# EAGLE board Buck V2 (EAGLE 9.4.2)
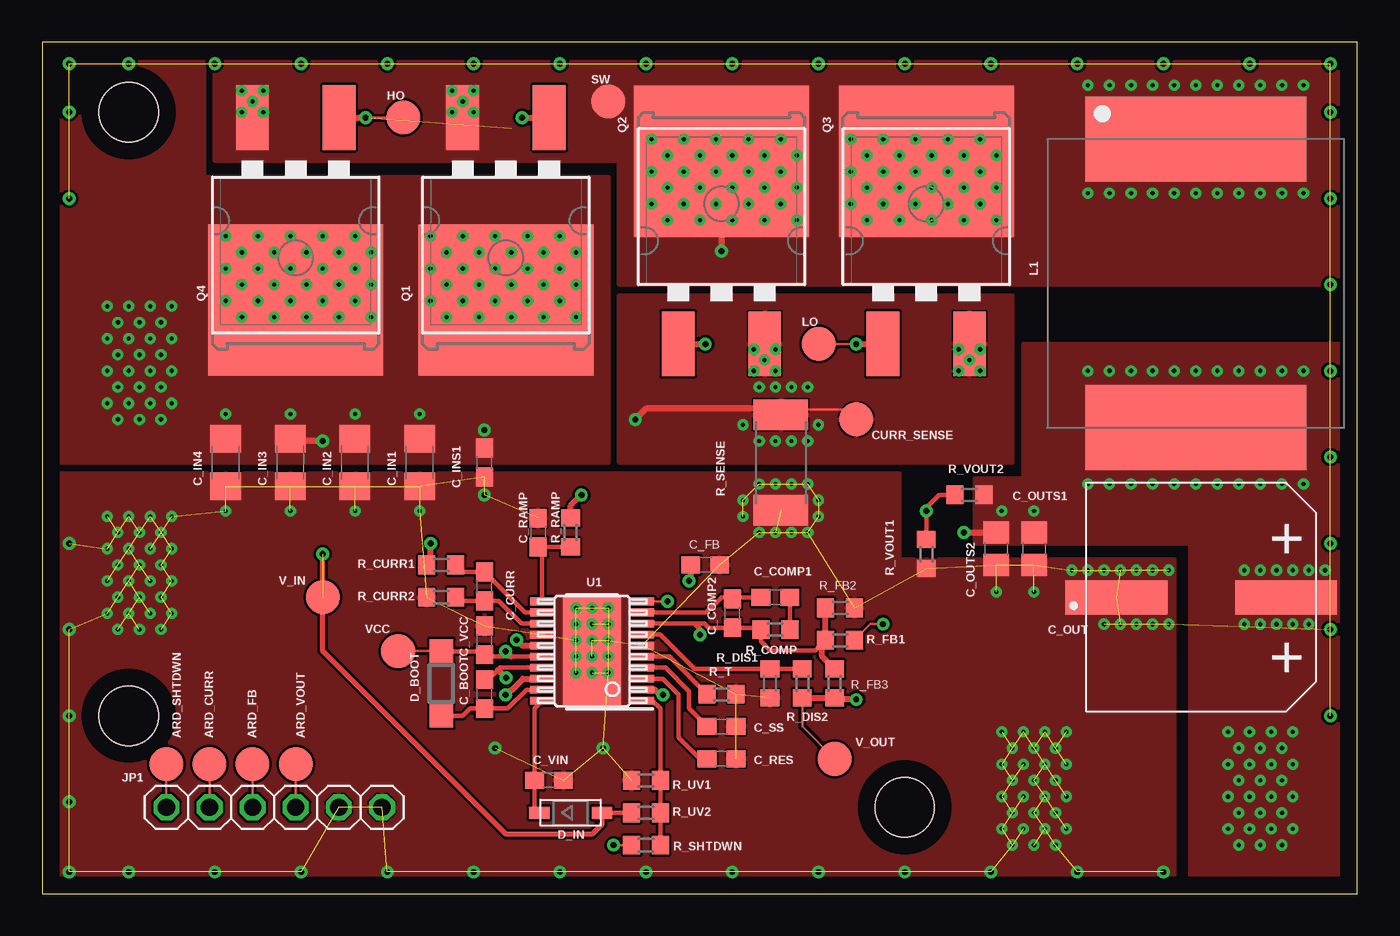
[diagram p0: board, top side]
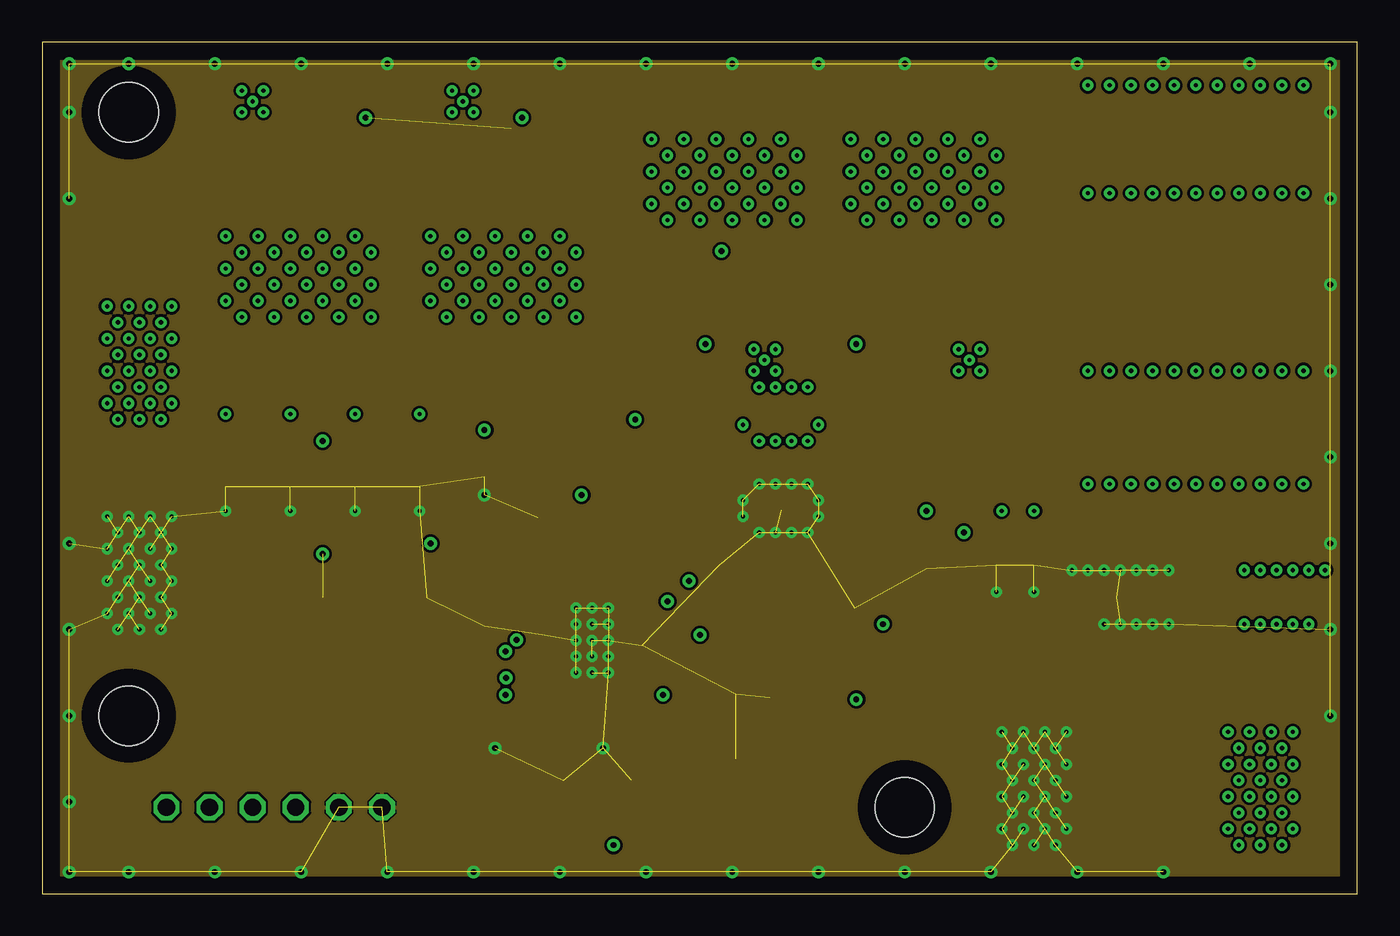
[diagram p1: board, inner layer Route2]
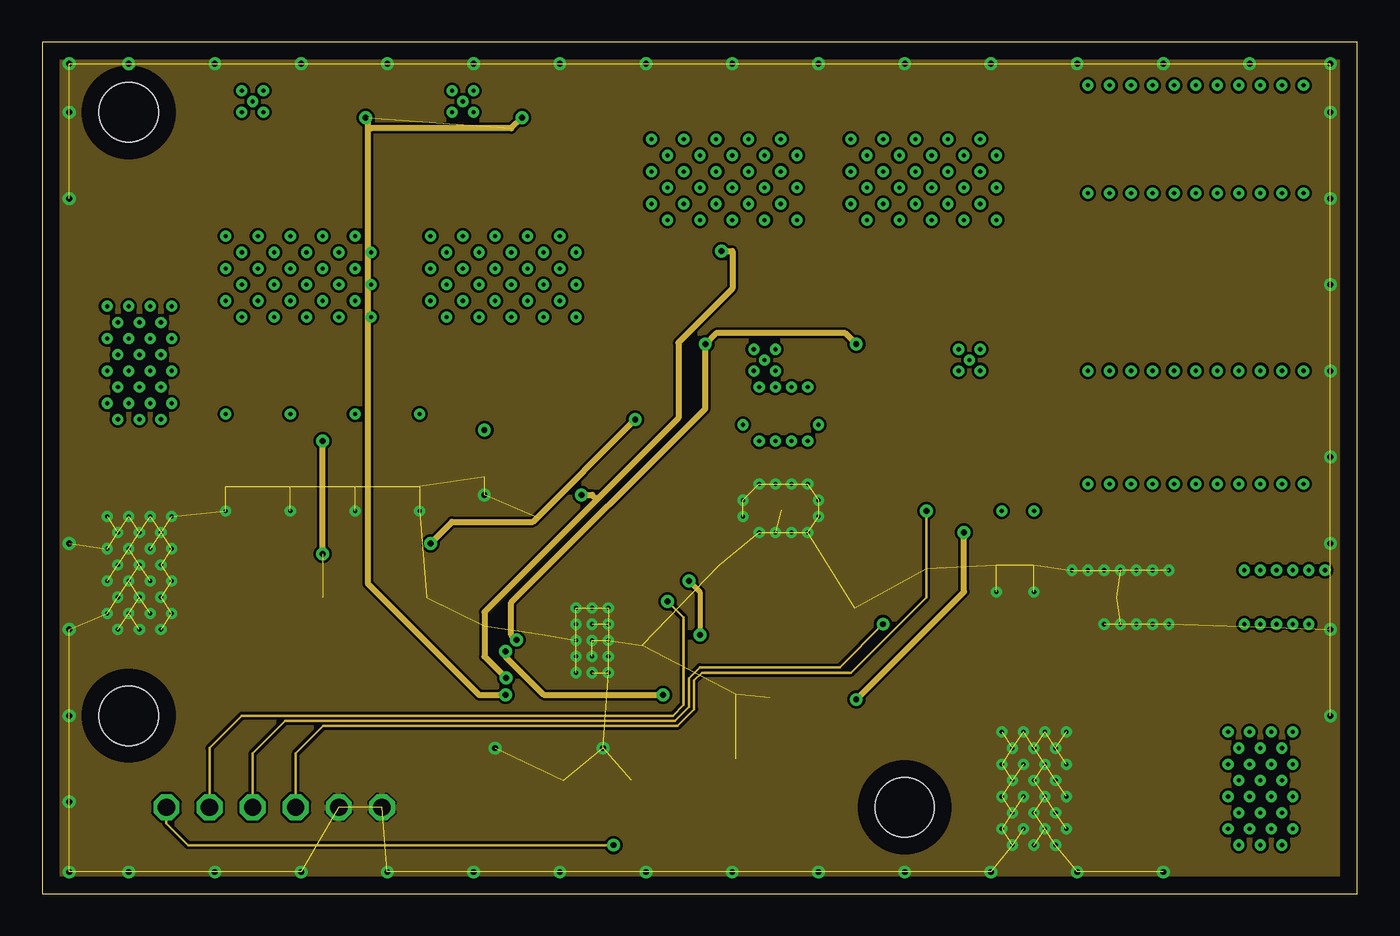
[diagram p2: board, inner layer Route15]
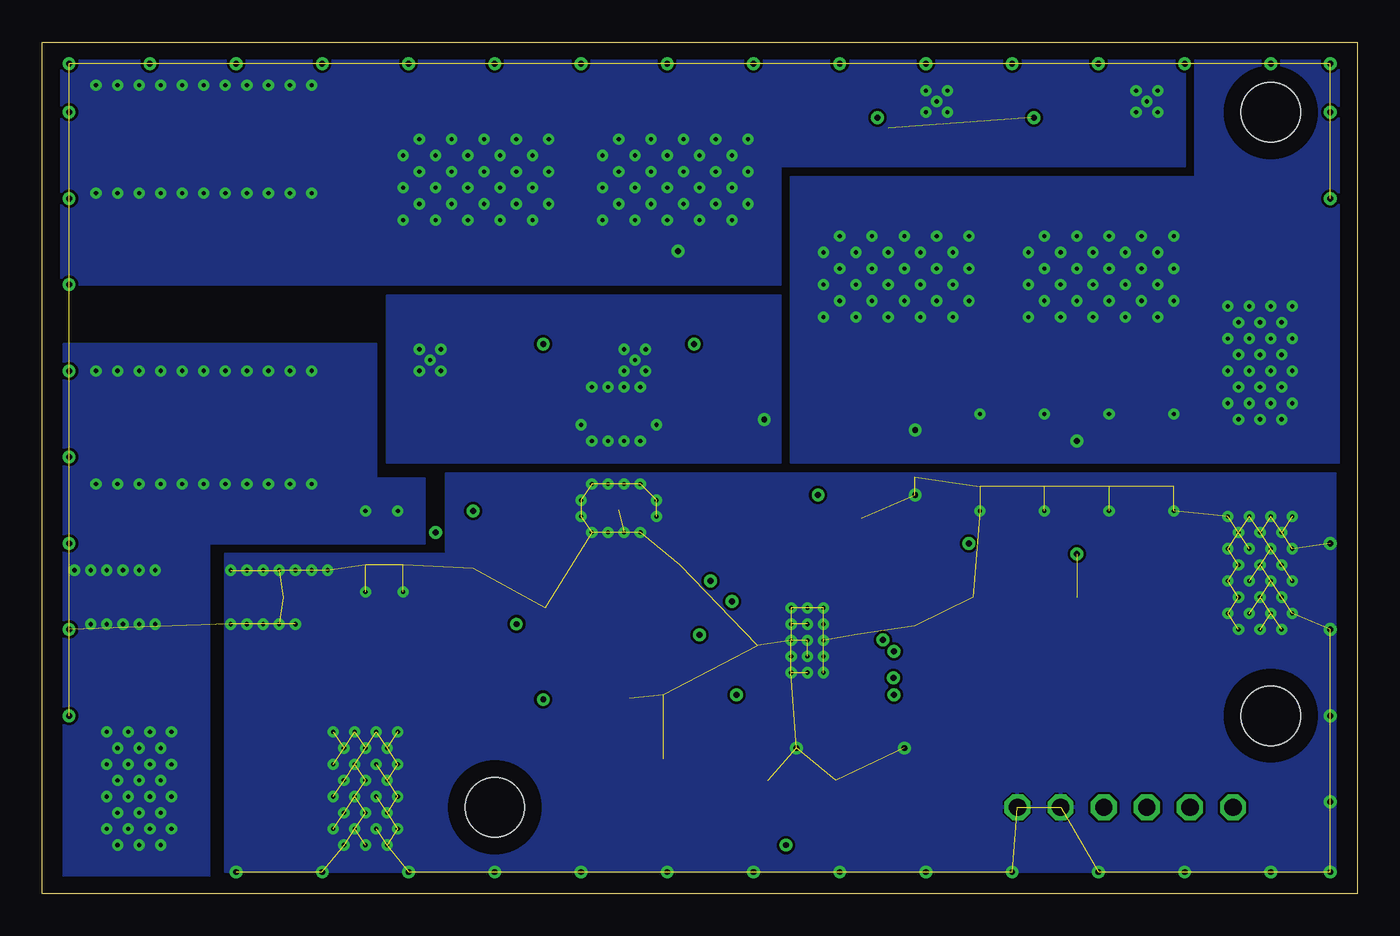
[diagram p3: board, bottom side, seen from below]

Size 77.45 x 50.15 mm. Coordinates in mm from the lower left corner, seen from the top.
Outline: 0,0 77.45,0 77.45,50.15 0,50.15 0,0
Copper layers (1+2*15+16): Top 0.035mm / dielectric 0.2mm / Route2 0.035mm / dielectric 1.3mm / Route15 0.035mm / dielectric 0.2mm / Bottom 0.035mm
Design rules "default *": minimum track width 4mil, minimum drill 0.2mm, track to track 6mil, track to pad 6mil, pad to pad 6mil, via to via 6mil, smd to smd 6mil, copper to edge 40mil, drill to drill 6mil, minimum pad ring 10mil, minimum via ring 8mil, stop-mask expansion 4mil, vias tented up to drill 0mil, thermal gap 4mil
Holes 3.48 mm at 50.8,5.08 5.08,46.04 5.08,10.48

## Footprints (pad centres in the part's own frame; a part is rotated, then mirrored left to right if it is on the bottom)
TP20R = smd 2 x 2: TP 0,0
C0603 = smd 1.1 x 1: 1 -0.85,0; 2 0.85,0
C1206 = smd 1.6 x 1.8: 1 -1.4,0; 2 1.4,0
CAP_PANASONIC_H13 = smd 6 x 2: P$1 -5,0; P$2 5,0
C0805 = smd 1.3 x 1.5: 1 -0.95,0; 2 0.95,0
SOD123 = smd 1.4 x 1.4: A 1.9,0; C -1.9,0
SOD-123 = smd 1.2 x 0.7: A 1.85,0; C -1.85,0
1X06 = drill 1.016 octagon: 1 -6.35,0; 2 -3.81,0; 3 -1.27,0; 4 1.27,0; 5 3.81,0; 6 6.35,0
17.5X17.5_INDUCTOR_SMD = smd 5 x 13: 1 0,0; 2 17,0
D2PAK = smd 1.93 x 3.81: 1 -2.55,-8.25; 3 2.55,-8.25 | smd 10.3 x 8.9: 2 0,2.5
R0603 = smd 1 x 1.1: 1 -0.85,0; 2 0.85,0
R2512 = smd 1.8 x 3.2: 1 -2.8,0; 2 2.8,0
PWP0020A = smd 1.4 x 0.45: 1 -2.95,2.925; 2 -2.95,2.275; 3 -2.95,1.625; 4 -2.95,0.975; 5 -2.95,0.325; 6 -2.95,-0.325; 7 -2.95,-0.975; 8 -2.95,-1.625; 9 -2.95,-2.275; 10 -2.95,-2.925; 11 2.95,-2.925; 12 2.95,-2.275; 13 2.95,-1.625; 14 2.95,-0.975; 15 2.95,-0.325; 16 2.95,0.325; 17 2.95,0.975; 18 2.95,1.625; 19 2.95,2.275; 20 2.95,2.925 | smd 3.4 x 6.5: 21 0,0

## Placement (x,y rotation side)
ARD_CURR  PTR1TP20R  [TP20R]  9.84,7.62 0 top
ARD_FB  PTR1TP20R  [TP20R]  12.38,7.62 0 top
ARD_SHTDWN  PTR1TP20R  [TP20R]  7.3,7.62 0 top
ARD_VOUT  PTR1TP20R  [TP20R]  14.92,7.62 0 top
C_BOOT  470 nF 50V  [C0603]  26.04,11.75 90 top
C_COMP1  1.2 nF  [C0603]  43.18,17.46 0 top
C_COMP2  82 pF  [C0603]  40.64,16.51 270 top
C_CURR  100 pF  [C0603]  26.04,18.1 270 top
C_FB  0.68 uF  [C0603]  39.05,19.37 0 top
C_IN1  10 uF  [C1206]  22.23,25.4 270 top
C_IN2  10 uF  [C1206]  18.41,25.4 270 top
C_IN3  10 uF  [C1206]  14.61,25.4 270 top
C_IN4  10 uF  [C1206]  10.79,25.4 270 top
C_INS1  100 nF  [C0603]  26.04,25.4 270 top
C_OUT  470 uF  [CAP_PANASONIC_H13]  68.26,17.46 0 top
C_OUTS1  1 uF  [C0805]  58.42,20.32 270 top
C_OUTS2  1 uF  [C0805]  56.2,20.32 270 top
C_RAMP  820pF 50V  [C0603]  29.21,21.27 90 top
C_RES  1 uF  [C0603]  40.01,7.94 0 top
C_SS  100 nF  [C0603]  40.01,9.84 0 top
C_VCC  1 UF  [C0603]  26.04,14.92 90 top
C_VIN  1 UF  [C0603]  29.84,6.67 0 top
CURR_SENSE  PTR1TP20R  [TP20R]  47.94,27.94 0 top
D_BOOT  PMEG10010ELRX  [SOD123]  23.5,12.38 90 top
D_IN  IN4148  [SOD-123]  31.11,4.76 0 top
HO  PTR1TP20R  [TP20R]  21.27,45.72 0 top
JP1  [1X06]  13.65,5.08 0 top
L1  [17.5X17.5_INDUCTOR_SMD]  67.94,44.45 270 top
LO  PTR1TP20R  [TP20R]  45.72,32.39 0 top
Q1  IRF3205STRLPBF  [D2PAK]  27.3,37.47 180 top
Q2  IRF3205STRLPBF  [D2PAK]  40.01,40.64 0 top
Q3  IRF3205STRLPBF  [D2PAK]  52.07,40.64 0 top
Q4  IRF3205STRLPBF  [D2PAK]  14.92,37.47 180 top
R_COMP  28.7 K  [R0603]  43.18,15.56 0 top
R_CURR1  100  [R0603]  23.5,19.37 180 top
R_CURR2  100  [R0603]  23.5,17.46 180 top
R_DIS1  3.3 K  [R0603]  42.86,12.38 270 top
R_DIS2  56 K  [R0603]  44.77,12.38 270 top
R_FB1  17 K  [R0603]  46.99,14.92 180 top
R_FB2  10 K  [R0603]  46.99,16.83 180 top
R_FB3  178 K  [R0603]  46.67,12.38 270 top
R_RAMP  180 KOhm  [R0603]  31.11,21.27 90 top
R_SENSE  1W 5mOhm  [R2512]  43.5,25.4 270 top
R_SHTDWN  1 K  [R0603]  35.56,2.86 0 top
R_T  12.1 K  [R0603]  40.01,11.75 180 top
R_UV1  3.3 K  [R0603]  35.56,6.67 180 top
R_UV2  56 K  [R0603]  35.56,4.76 180 top
R_VOUT1  1 K  [R0603]  52.07,20 90 top
R_VOUT2  5 K  [R0603]  54.61,23.49 0 top
SW  PTR1TP20R  [TP20R]  33.34,46.67 0 top
U1  Value  [PWP0020A]  32.38,14.29 180 top
V_IN  PTR1TP20R  [TP20R]  16.51,17.46 0 top
V_OUT  PTR1TP20R  [TP20R]  46.67,7.94 0 top
VCC  PTR1TP20R  [TP20R]  20.95,14.29 0 top

## Library data of the parts
ARD_CURR ARD_FB ARD_SHTDWN ARD_VOUT CURR_SENSE HO LO SW V_IN V_OUT VCC = testpad
C_BOOT C_IN4 C_OUTS1 C_OUTS2 C_RAMP C_VCC C_VIN = rcl; SPICEPREFIX: C
C_COMP1 C_COMP2 C_CURR C_FB C_IN1-C_IN3 C_INS1 C_RES C_SS R_COMP R_CURR1 R_CURR2 R_DIS1 R_DIS2 R_FB1-R_FB3 R_SHTDWN R_T R_UV1 R_UV2 R_VOUT1 R_VOUT2 = rcl
C_OUT L1 = custom-parts
D_BOOT = diode
D_IN JP1 = adafruit
Q1-Q4 = mixed_components
R_RAMP R_SENSE = rcl; SPICEPREFIX: R
U1 = AcceleratedDesigns_Lib; MANUFACTURER: Texas Instruments; PARTNUMBER: LM5117PMHXNOPB; REFDES: RefDes; TYPE: TYPE

## Nets
ARD_CURRENT: ARD_CURR.TP JP1.2 U1.10
ARD_FEEDBACK: ARD_FB.TP JP1.3 R_FB1.1
ARD_SHUTDOWN: ARD_SHTDWN.TP JP1.1 R_SHTDWN.1
ARD_VOUT: ARD_VOUT.TP JP1.4 R_VOUT1.2 R_VOUT2.1
GND: C_FB.2 C_IN1.2 C_IN2.2 C_IN3.2 C_IN4.2 C_INS1.2 C_OUT.P$1 C_OUTS1.2 C_OUTS2.2 C_RAMP.2 C_RES.2 C_SS.2 C_VCC.2 C_VIN.2 JP1.5 JP1.6 R_CURR2.2 R_DIS1.2 R_FB2.1 R_SENSE.2 R_T.1 R_UV1.2 R_VOUT1.1 U1.6 U1.14 U1.21
N$1: C_VCC.1 D_BOOT.A U1.2 U1.16 VCC.TP
N$2: C_BOOT.1 D_BOOT.C U1.19
N$3: C_BOOT.2 L1.1 Q1.3 Q2.2 Q3.2 Q4.3 R_RAMP.2 SW.TP U1.17
N$4: CURR_SENSE.TP Q2.3 Q3.3 R_CURR1.2 R_SENSE.1
N$5: C_RAMP.1 R_RAMP.1 U1.11
N$7: LO.TP Q2.1 Q3.1 U1.15
N$8: HO.TP Q1.1 Q4.1 U1.18
N$9: C_COMP1.2 R_COMP.2
N$10: C_VIN.1 D_IN.C U1.20
N$11: R_SHTDWN.2 R_UV1.1 R_UV2.1 U1.1
N$13: R_DIS1.1 R_DIS2.1 U1.7
N$14: C_COMP1.1 C_COMP2.1 U1.9
N$15: C_COMP2.2 C_FB.1 R_COMP.1 R_FB1.2 R_FB2.2 R_FB3.1 U1.8
N$16: R_T.2 U1.5
N$17: C_RES.1 U1.3
N$18: C_SS.1 U1.4
N$19: C_CURR.1 R_CURR1.1 U1.12
N$20: C_CURR.2 R_CURR2.1 U1.13
N$21: C_IN1.1 C_IN2.1 C_IN3.1 C_IN4.1 C_INS1.1 D_IN.A Q1.2 Q4.2 R_UV2.2 V_IN.TP
V_OUT: C_OUT.P$2 C_OUTS1.1 C_OUTS2.1 L1.2 R_DIS2.2 R_FB3.2 R_VOUT2.2 V_OUT.TP

## Tracks (layer width: path | path; a pad name or v marks a point on that pad's centre or on a via)
ARD_CURRENT  (via drill 0.35)
  Top 0.152: U1.10 35.34,17.22 v36.83,17.22 | JP1.2 ARD_CURR.TP
  Route15 0.152: v36.83,17.22 37.78,16.27 37.78,11.11 37.15,10.48 11.75,10.48 9.84,8.57 JP1.2
ARD_FEEDBACK  (via drill 0.35)
  Top 0.152: R_FB1.1 48.79,15.87 v49.53,15.87 | JP1.3 ARD_FB.TP
  Route15 0.152: JP1.3 12.38,8.26 14.3,10.17 37.27,10.17 38.09,10.99 38.09,12.69 38.73,13.34 46.99,13.34 v49.53,15.87
ARD_SHUTDOWN  (via drill 0.35)
  Top 0.152: R_SHTDWN.1 v33.66,2.86 | JP1.1 ARD_SHTDWN.TP
  Route15 0.152: v33.66,2.86 8.57,2.86 7.3,4.13 JP1.1
ARD_VOUT  (via drill 0.35)
  Top 0.152: JP1.4 ARD_VOUT.TP
  Top 0.254: R_VOUT2.1 52.81,23.49 52.07,22.76 v52.07,22.54 R_VOUT1.2
  Route15 0.152: JP1.4 14.92,8.26 16.54,9.87 37.4,9.87 38.39,10.86 38.39,12.56 38.85,13.02 47.62,13.02 52.07,17.46 v52.07,22.54
GND  (via drill 0.25, 0.35)  (173 unrouted)
  other vias: 1.59,1.27 5.08,1.27 10.16,1.27 15.24,1.27 20.32,1.27 25.4,1.27 1.59,5.4 1.59,10.48 1.59,15.56 30.48,1.27 35.56,1.27 40.64,1.27 45.72,1.27 50.8,1.27 55.88,1.27 60.96,1.27 66.04,1.27 75.88,10.48 75.88,15.56 75.88,20.64 75.88,25.72 75.88,30.8 75.88,35.88 75.88,40.96 75.88,46.04 1.59,20.64 1.59,40.96 1.59,46.04 1.59,48.9 5.08,48.9 10.16,48.9 15.24,48.9 20.32,48.9 25.4,48.9 30.48,48.9 35.56,48.9 40.64,48.9 45.72,48.9 50.8,48.9 55.88,48.9 60.96,48.9 66.04,48.9 71.12,48.9 75.88,48.9 32.38,16.83 31.43,16.83 33.34,16.83 31.43,15.88 32.38,15.88 33.34,15.88 31.43,14.92 32.38,14.92 33.34,14.92 31.43,13.97 32.38,13.97 33.34,13.97 31.43,13.02 32.38,13.02 33.34,13.02 56.2,17.78 58.42,17.78 41.27,23.18 41.27,22.22 42.23,21.27 43.18,21.27 44.13,21.27 45.09,21.27 42.23,24.13 43.18,24.13 44.13,24.13 45.09,24.13 45.72,23.18 45.72,22.22 10.79,22.54 14.61,22.54 18.41,22.54 22.23,22.54 60.64,19.05 61.59,19.05 62.55,19.05 63.5,19.05 64.45,19.05 65.41,19.05 66.36,19.05 66.36,15.88 65.41,15.88 64.45,15.88 63.5,15.88 62.55,15.88 56.52,9.53 57.78,9.53 59.05,9.53 60.33,9.53 57.15,8.57 58.42,8.57 59.69,8.57 56.52,7.62 57.78,7.62 59.05,7.62 60.33,7.62 57.15,6.67 58.42,6.67 59.69,6.67 56.52,5.71 57.78,5.71 59.05,5.71 60.33,5.71 57.15,4.76 58.42,4.76 59.69,4.76 56.52,3.81 57.78,3.81 59.05,3.81 60.33,3.81 57.15,2.86 58.42,2.86 59.69,2.86 3.81,22.22 5.08,22.22 6.35,22.22 7.62,22.22 4.45,21.27 5.71,21.27 6.99,21.27 3.81,20.32 5.08,20.32 6.35,20.32 7.62,20.32 4.45,19.37 5.71,19.37 6.99,19.37 3.81,18.41 5.08,18.41 6.35,18.41 7.62,18.41 4.45,17.46 5.71,17.46 6.99,17.46 3.81,16.51 5.08,16.51 6.35,16.51 7.62,16.51 4.45,15.56 5.71,15.56 6.99,15.56 26.67,8.57 33.02,8.57 26.04,23.49
  pour Top: 0.32,24.77 50.48,24.77 50.48,19.68 66.67,19.68 66.67,0.64 0.32,0.64
  pour Route15: 0.32,49.53 77.15,49.53 77.15,0.32 0.32,0.32
  pour Route2: 0.64,49.21 0.64,0.32 77.15,0.32 77.15,49.21
  pour Bottom: 1.27,24.77 53.66,24.77 53.66,20 66.67,20 66.67,1.27 1.27,1.27
  pour Top (no thermals): 8.57,24.77 50.48,24.77 50.48,19.68 66.67,19.68 66.67,15.24 59.05,15.24 59.05,16.83 49.21,16.83 49.21,20.64 32.7,20.64 32.7,24.13 27.3,24.13 27.3,22.22 8.57,22.22
  pour Top (no thermals): 28.26,18.1 36.51,18.1 36.51,10.48 28.26,10.48
N$1  (via drill 0.35)
  Top 0.152: VCC.TP D_BOOT.A
  Top 0.254: U1.16 27.62,13.96 26.14,13.96 C_VCC.1 25.82,14.28 D_BOOT.A
  Top 0.356: 27.62,13.96 27.32,14.27 v27.29,14.27 | U1.2 36.08,12.01 36.37,11.72 v36.57,11.72
  Route15 0.356: v27.29,14.27 27.29,13.95 29.52,11.72 v36.57,11.72
N$2
  Top 0.254: U1.19 28.52,12.01 27.41,10.9 C_BOOT.1 25.18,10.9 24.77,10.48 D_BOOT.C
N$3  (via drill 0.25, 0.35)
  Top 0.254: U1.17 26.96,13.31 26.83,13.18 26.14,12.49 C_BOOT.2
  Top 0.356: Q2.2 v40.01,37.86 | v27.3,12.7 26.83,13.18 | R_RAMP.2 31.11,22.86 v31.75,23.49
  Route15 0.356: v40.01,37.86 40.64,37.86 40.64,35.63 37.47,32.46 37.47,28.01 32.67,23.21 | 32.67,23.21 26.04,16.58 26.04,13.97 v27.3,12.7 | 32.67,23.21 32.38,23.49 v31.75,23.49
  other vias: 35.88,44.45 36.83,43.5 37.78,44.45 38.73,43.5 39.69,44.45 40.64,43.5 41.59,44.45 42.55,43.5 43.5,44.45 44.45,43.5 35.88,42.55 37.78,42.55 39.69,42.55 41.59,42.55 43.5,42.55 36.83,41.59 38.73,41.59 40.64,41.59 42.55,41.59 44.45,41.59 43.5,40.64 41.59,40.64 39.69,40.64 37.78,40.64 35.88,40.64 36.83,39.69 38.73,39.69 40.64,39.69 42.55,39.69 44.45,39.69 47.62,44.45 48.58,43.5 49.53,44.45 50.48,43.5 51.44,44.45 52.39,43.5 53.34,44.45 54.29,43.5 55.24,44.45 56.2,43.5 47.62,42.55 49.53,42.55 51.44,42.55 53.34,42.55 55.24,42.55 48.58,41.59 50.48,41.59 52.39,41.59 54.29,41.59 56.2,41.59 55.24,40.64 53.34,40.64 51.44,40.64 49.53,40.64 47.62,40.64 48.58,39.69 50.48,39.69 52.39,39.69 54.29,39.69 56.2,39.69 61.59,47.62 62.87,47.62 64.14,47.62 65.41,47.62 66.67,47.62 67.94,47.62 69.22,47.62 70.48,47.62 71.75,47.62 73.03,47.62 74.3,47.62 61.59,41.28 62.87,41.28 64.14,41.28 65.41,41.28 66.67,41.28 67.94,41.28 69.22,41.28 70.48,41.28 71.75,41.28 73.03,41.28 74.3,41.28 11.75,47.31 13.02,47.31 12.38,46.67 11.75,46.04 13.02,46.04 24.13,47.31 25.4,47.31 24.77,46.67 24.13,46.04 25.4,46.04
  pour Top (no thermals): 10.16,49.21 10.16,43.18 33.97,43.18 33.97,35.88 76.83,35.88 76.83,49.21
  pour Bottom: 10.16,49.85 76.52,49.85 76.52,35.88 33.97,35.88 33.97,42.86 10.16,42.86
N$4  (via drill 0.25, 0.35)
  Top 0.152: R_SENSE.1 43.81,28.52 47.37,28.52 CURR_SENSE.TP
  Top 0.356: R_CURR1.2 22.86,19.58 v22.86,20.64 | v34.92,27.94 35.56,28.58 43.12,28.58 R_SENSE.1
  Route15 0.356: v22.86,20.64 24.13,21.91 28.89,21.91 v34.92,27.94
  other vias: 41.27,27.62 45.72,27.62 42.23,29.84 45.09,29.84 42.23,26.67 43.18,26.67 44.13,26.67 45.09,26.67 41.91,30.8 43.18,30.8 42.55,31.43 41.91,32.07 43.18,32.07 53.98,30.8 55.24,30.8 54.61,31.43 53.98,32.07 55.24,32.07 43.18,29.84 44.13,29.84
  pour Top: 33.97,35.24 33.97,25.4 57.15,25.4 57.15,35.24
  pour Bottom: 33.97,35.24 57.15,35.24 57.15,25.4 33.97,25.4
N$5
  Top 0.254: U1.11 29.43,20.2 C_RAMP.1 R_RAMP.1
N$7  (via drill 0.35)
  Top 0.152: LO.TP v47.94,32.39
  Top 0.356: Q2.1 v39.05,32.39 | v47.94,32.39 Q3.1 | v27.94,14.94 28.27,14.61 U1.15
  Route15 0.356: v47.94,32.39 47.31,33.02 39.69,33.02 v39.05,32.39 39.05,28.58 27.62,17.15 27.62,15.26 v27.94,14.94
N$8  (via drill 0.35)  (1 unrouted)
  Top 0.152: v19.05,45.72 HO.TP
  Top 0.356: Q4.1 v19.05,45.72 | v28.26,45.72 Q1.1 | U1.18 28.31,12.66 27.6,11.95 27.53,11.95 v27.28,11.7
  Top 0.457: Q4.1
  Route15 0.356: v19.05,45.72 19.18,45.72 19.18,18.25 25.73,11.7 v27.28,11.7 | v28.26,45.72 27.62,45.08 19.37,45.08
N$9
  Top 0.254: C_COMP1.2 R_COMP.2
N$10
  Top 0.254: U1.20 29,10.92 C_VIN.1 29,5.03 D_IN.C
N$11
  Top 0.254: U1.1 35.95,11.36 36.41,10.9 R_UV1.1 R_UV2.1 R_SHTDWN.2
N$13
  Top 0.254: U1.7 36.39,15.26 38.42,13.23 R_DIS1.1 R_DIS2.1
N$14
  Top 0.254: U1.9 39.1,16.56 40.01,17.46 40.54,17.46 C_COMP2.1 40.74,17.46 C_COMP1.1
N$15  (via drill 0.35)
  Top 0.254: U1.8 38.42,15.91 39.02,15.91 39.27,15.66 C_COMP2.2 42.23,15.66 R_COMP.1 42.33,14.86 42.86,14.33 45.55,14.33 45.93,14.71 R_FB1.2
  Top 0.305: C_FB.1 38.2,18.52 v38.1,18.42 | v38.73,15.24 38.73,15.59 38.42,15.91
  Top 0.356: R_FB3.1 45.93,13.98 45.93,14.71 | R_FB1.2 R_FB2.2
  Route15 0.305: v38.1,18.42 38.73,17.78 v38.73,15.24
N$16
  Top 0.254: R_T.2 36.94,13.96 U1.5
N$17
  Top 0.254: U1.3 36.55,12.66 37.47,11.75 37.47,9.21 38.73,7.94 C_RES.1
N$18
  Top 0.254: U1.4 36.7,13.31 38.1,11.91 38.1,10.9 C_SS.1
N$19
  Top 0.254: U1.12 28.42,16.56 C_CURR.1 24.77,18.95 R_CURR1.1
N$20
  Top 0.254: U1.13 28.22,15.91 26.89,17.25 C_CURR.2 24.56,17.25 R_CURR2.1
N$21  (via drill 0.25, 0.35)  (1 unrouted)
  Top 0.254: R_UV2.2 D_IN.A
  Top 0.305: D_IN.A 32.97,4.07 32.38,3.49 27.3,3.49 16.51,14.29 v16.51,20
  Top 0.356: v16.51,26.67 14.73,26.67 C_IN3.1
  Route15 0.356: v16.51,20 v16.51,26.67
  other vias: 10.79,38.73 11.75,37.78 12.7,38.73 13.65,37.78 14.61,38.73 15.56,37.78 16.51,38.73 17.46,37.78 18.41,38.73 19.37,37.78 10.79,36.83 12.7,36.83 14.61,36.83 16.51,36.83 18.41,36.83 11.75,35.88 13.65,35.88 15.56,35.88 17.46,35.88 19.37,35.88 18.41,34.93 16.51,34.93 14.61,34.93 12.7,34.93 10.79,34.93 11.75,33.97 13.65,33.97 15.56,33.97 17.46,33.97 19.37,33.97 22.86,38.73 23.81,37.78 24.77,38.73 25.72,37.78 26.67,38.73 27.62,37.78 28.57,38.73 29.53,37.78 30.48,38.73 31.43,37.78 22.86,36.83 24.77,36.83 26.67,36.83 28.57,36.83 30.48,36.83 23.81,35.88 25.72,35.88 27.62,35.88 29.53,35.88 31.43,35.88 30.48,34.93 28.57,34.93 26.67,34.93 24.77,34.93 22.86,34.93 23.81,33.97 25.72,33.97 27.62,33.97 29.53,33.97 31.43,33.97 10.79,28.26 14.61,28.26 18.41,28.26 22.23,28.26 3.81,34.61 5.08,34.61 6.35,34.61 7.62,34.61 4.45,33.66 5.71,33.66 6.99,33.66 3.81,32.7 5.08,32.7 6.35,32.7 7.62,32.7 4.45,31.75 5.71,31.75 6.99,31.75 3.81,30.8 5.08,30.8 6.35,30.8 7.62,30.8 4.45,29.84 5.71,29.84 6.99,29.84 3.81,28.89 5.08,28.89 6.35,28.89 7.62,28.89 4.45,27.94 5.71,27.94 6.99,27.94 26.04,27.3
  pour Top (no thermals): 9.53,49.21 9.53,42.23 33.34,42.23 33.34,25.4 0.32,25.4 0.32,49.21
  pour Bottom: 0.95,49.85 9.53,49.85 9.53,42.23 33.34,42.23 33.34,25.4 0.95,25.4
V_OUT  (via drill 0.25, 0.35)
  Top 0.152: V_OUT.TP 44.77,9.84 R_DIS2.2
  Top 0.356: v54.29,21.27 C_OUTS2.1 | v47.94,11.43 46.77,11.43 R_FB3.2 R_DIS2.2
  Route15 0.356: v54.29,21.27 54.29,17.78 v47.94,11.43
  other vias: 75.56,19.05 74.61,19.05 73.66,19.05 72.71,19.05 71.75,19.05 70.8,19.05 70.8,15.88 71.75,15.88 72.71,15.88 73.66,15.88 74.61,15.88 61.59,30.8 62.87,30.8 64.14,30.8 65.41,30.8 66.67,30.8 67.94,30.8 69.22,30.8 70.48,30.8 71.75,30.8 73.03,30.8 74.3,30.8 61.59,24.13 62.87,24.13 64.14,24.13 65.41,24.13 66.67,24.13 67.94,24.13 69.22,24.13 70.48,24.13 71.75,24.13 73.03,24.13 74.3,24.13 58.42,22.54 56.52,22.54 69.85,9.53 71.12,9.53 72.39,9.53 73.66,9.53 70.48,8.57 71.75,8.57 73.03,8.57 69.85,7.62 71.12,7.62 72.39,7.62 73.66,7.62 70.48,6.67 71.75,6.67 73.03,6.67 69.85,5.71 71.12,5.71 72.39,5.71 73.66,5.71 70.48,4.76 71.75,4.76 73.03,4.76 69.85,3.81 71.12,3.81 72.39,3.81 73.66,3.81 70.48,2.86 71.75,2.86 73.03,2.86
  pour Top (no thermals): 57.78,32.39 76.83,32.39 76.83,0.64 67.63,0.64 67.63,20.64 54.93,20.64 54.93,24.45 57.78,24.45
  pour Bottom: 57.78,32.39 76.2,32.39 76.2,0.95 67.63,0.95 67.63,20.64 54.93,20.64 54.93,24.45 57.78,24.45